# EAGLE board 8bitbig-bacon_home-back_pcb (EAGLE 9.2.2)
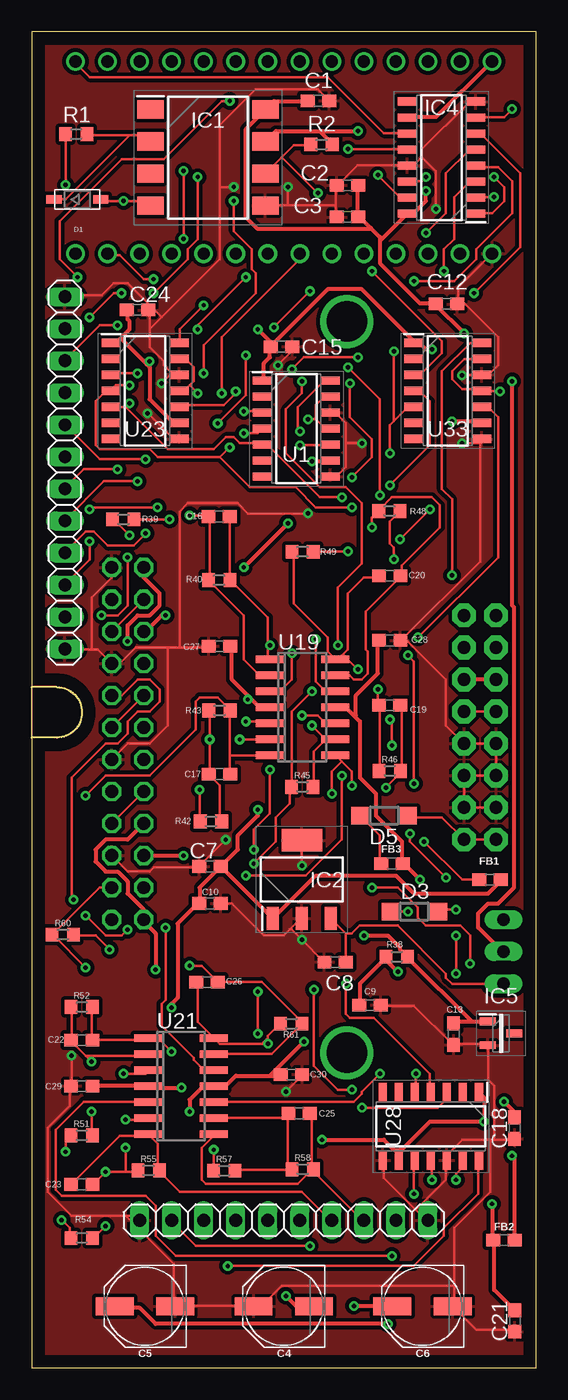
[diagram p0: board, top side]
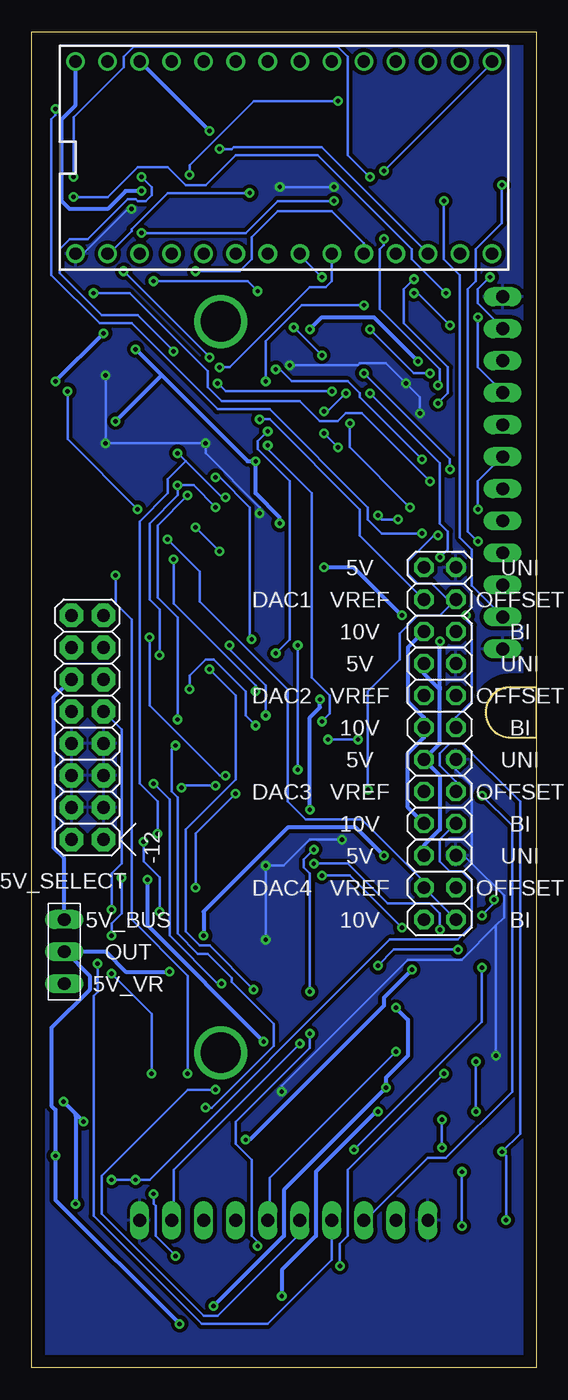
[diagram p1: board, bottom side, seen from below]

Size 40 x 106 mm. Coordinates in mm from the lower left corner, seen from the top.
Outline: 0,0 40,0 40,106 0,106 0,0
Copper layers (1*16): Top 0.035mm / dielectric 1.5mm / Bottom 0.035mm
Design rules "default *": minimum track width 6mil, minimum drill 0.35mm, track to track 0.3mm, track to pad 0.3mm, pad to pad 0.3mm, via to via 0.3mm, smd to smd 0.3mm, copper to edge 40mil, drill to drill 0.3mm, minimum pad ring 10mil, minimum via ring 8mil, stop-mask expansion 4mil, vias tented up to drill 0mil, thermal gap 10mil
Net classes: 0 default: width 0.203 mm, clearance 0.203 mm; 1 powerlines: width 0.305 mm, clearance 0.305 mm

## Footprints (pad centres in the part's own frame; a part is rotated, then mirrored left to right if it is on the bottom)
C0603 = smd 1.1 x 1: 1 -0.85,0; 2 0.85,0
PANASONIC_D = smd 3 x 1.4: + 2.4,0; - -2.4,0
SOD-123 = smd 1.2 x 0.7: A 1.85,0; C -1.85,0
DIODE_SOD123 = smd 1.4 x 1.4: A 1.9,0; C -1.9,0
NEW_SELECTOR = drill 1.016 octagon: 1 0,5.08; 2 2.54,5.08; 3 0,2.54; 4 2.54,2.54; 5 0,0; 6 2.54,0
0603 = smd 1.1 x 1: 1 -0.85,0; 2 0.85,0
SOP254P1016X460-8N = smd 2.1 x 1.45: 1 -4.55,3.81; 2 -4.55,1.27; 3 -4.55,-1.27; 4 -4.55,-3.81; 5 4.55,-3.81; 6 4.55,-1.27; 7 4.55,1.27; 8 4.55,3.81
SOT230P700X180-4N = smd 1.8 x 0.95: 1 -3.1,2.3; 2 -3.1,0; 3 -3.1,-2.3 | smd 1.8 x 3.2: 4 3.1,0
SOIC127P600X175-16N = smd 1.525 x 0.65: 1 -2.712,4.445; 2 -2.712,3.175; 3 -2.712,1.905; 4 -2.712,0.635; 5 -2.712,-0.635; 6 -2.712,-1.905; 7 -2.712,-3.175; 8 -2.712,-4.445; 9 2.712,-4.445; 10 2.712,-3.175; 11 2.712,-1.905; 12 2.712,-0.635; 13 2.712,0.635; 14 2.712,1.905; 15 2.712,3.175; 16 2.712,4.445
SOT95P237X112-3N = smd 1.25 x 0.6: 1 -1.05,0.95; 2 -1.05,-0.95; 3 1.05,0
SELECTOR_POWER = drill 1.016 long: 1-BUS 0,5.08; 2-OUT 0,2.54; 3-5V_VR 0,0
1X12 = drill 1.016 long: 1 -13.97,0; 2 -11.43,0; 3 -8.89,0; 4 -6.35,0; 5 -3.81,0; 6 -1.27,0; 7 1.27,0; 8 3.81,0; 9 6.35,0; 10 8.89,0; 11 11.43,0; 12 13.97,0
1X10 = drill 1.016 long: 1 -11.43,0; 2 -8.89,0; 3 -6.35,0; 4 -3.81,0; 5 -1.27,0; 6 1.27,0; 7 3.81,0; 8 6.35,0; 9 8.89,0; 10 11.43,0
R0603 = smd 1 x 1.1: 1 -0.85,0; 2 0.85,0
TEENSY_3.0-3.2&LC_DIL = drill 0.965: 0 -7.62,13.97; 1 -7.62,11.43; 2 -7.62,8.89; 3 -7.62,6.35; 3.3V 7.62,11.43; 4 -7.62,3.81; 5 -7.62,1.27; 6 -7.62,-1.27; 7 -7.62,-3.81; 8 -7.62,-6.35; 9 -7.62,-8.89; 10 -7.62,-11.43; 11 -7.62,-13.97; 12 -7.62,-16.51; 13 7.62,-16.51; 14/A0 7.62,-13.97; 15/A1 7.62,-11.43; 16/A2 7.62,-8.89; 17/A3 7.62,-6.35; 18/A4 7.62,-3.81; 19/A5 7.62,-1.27; 20/A6 7.62,1.27; 21/A7 7.62,3.81; 22/A8 7.62,6.35; 23/A9 7.62,8.89; AGND 7.62,13.97; GND -7.62,16.51; VIN 7.62,16.51
SOIC127P600X175-14N = smd 1.5 x 0.65: 1 -2.7,3.81; 2 -2.7,2.54; 3 -2.7,1.27; 4 -2.7,0; 5 -2.7,-1.27; 6 -2.7,-2.54; 7 -2.7,-3.81; 8 2.7,-3.81; 9 2.7,-2.54; 10 2.7,-1.27; 11 2.7,0; 12 2.7,1.27; 13 2.7,2.54; 14 2.7,3.81
SO14 = smd 0.6 x 2.2: 1 -3.81,-2.6; 2 -2.54,-2.6; 3 -1.27,-2.6; 4 0,-2.6; 5 1.27,-2.6; 6 2.54,-2.6; 7 3.81,-2.6; 8 3.81,2.6; 9 2.54,2.6; 10 1.27,2.6; 11 0,2.6; 12 -1.27,2.6; 13 -2.54,2.6; 14 -3.81,2.6
POWER_16 = drill 1.016 pad 1.88 octagon: 1 -6.35,-1.27; 2 -6.35,1.27; 3 -3.81,-1.27; 4 -3.81,1.27; 5 -1.27,-1.27; 6 -1.27,1.27; 7 1.27,-1.27; 8 1.27,1.27; 9 3.81,-1.27; 10 3.81,1.27; 11 6.35,-1.27; 12 6.35,1.27; 13 8.89,-1.27; 14 8.89,1.27; 15 11.43,-1.27; 16 11.43,1.27

## Placement (x,y rotation side)
C1  100n  [C0603]  22.75,100.5 0 top
C2  1u  [C0603]  25.06,93.8 180 top
C3  100n  [C0603]  25.04,91.29 180 top
C4  47uF  [PANASONIC_D]  20,4.89 180 top
C5  47uF  [PANASONIC_D]  9,4.89 180 top
C6  47uF  [PANASONIC_D]  31,4.89 180 top
C7  330n  [C0603]  14.16,39.78 180 top
C8  100n  [C0603]  24.08,32.2 180 top
C9  100n  [C0603]  26.83,28.78 0 top
C10  100n  [C0603]  14.14,36.84 0 top
C12  100n  [C0603]  32.91,84.39 0 top
C13  100n  [C0603]  33.46,26.48 270 top
C15  100n  [C0603]  19.81,81 0 top
C16  47p  [C0603]  14.88,67.53 0 top
C17  47p  [C0603]  14.9,47.1 0 top
C18  100n  [C0603]  38.3,19.02 270 top
C19  47p  [C0603]  28.4,52.56 0 top
C20  47p  [C0603]  28.4,62.83 180 top
C21  100n  [C0603]  38.32,3.74 270 top
C22  47p  [C0603]  3.98,26 0 top
C23  47p  [C0603]  3.98,14.57 180 top
C24  100n  [C0603]  8.4,83.91 0 top
C25  47p  [C0603]  21.22,20.2 0 top
C26  47p  [C0603]  13.92,30.61 180 top
C27  100n  [C0603]  14.9,57.25 180 top
C28  100n  [C0603]  28.4,57.71 180 top
C29  100n  [C0603]  3.98,22.36 180 top
C30  100n  [C0603]  20.6,23.28 180 top
D1  4148 SOD 123  [SOD-123]  3.63,92.68 0 top
D3  1N5819HW  [DIODE_SOD123]  30.35,36.2 0 top
D5  1N5819HW  [DIODE_SOD123]  27.96,43.81 180 top
DAC1  [NEW_SELECTOR]  6.35,63.5 180 bottom
DAC2  [NEW_SELECTOR]  6.35,55.88 180 bottom
DAC3  [NEW_SELECTOR]  6.35,48.26 180 bottom
DAC4  [NEW_SELECTOR]  6.35,40.64 180 bottom
FB1  30Ω/1.8A  [0603]  36.34,38.73 0 top
FB2  30Ω/1.8A  [0603]  37.47,10.14 0 top
FB3  30Ω/1.8A  [0603]  28.57,40.01 0 top
IC1  6N137S  [SOP254P1016X460-8N]  14,96 0 top
IC2  UA78M05CDCYR  [SOT230P700X180-4N]  21.43,38.75 90 top
IC4  SN74HC595DR  [SOIC127P600X175-16N]  32.5,96 180 top
IC5  LM4040CIM3-2.5_NOPB  [SOT95P237X112-3N]  37.23,26.54 0 top
JP1  [SELECTOR_POWER]  37.41,30.48 0 bottom
JP2  [1X12]  2.65,71 270 top
JP3  [1X10]  20,11.71 0 top
R1  220R  [R0603]  3.55,97.86 0 top
R2  470R  [R0603]  22.99,97.04 0 top
R38  470R  [R0603]  28.96,32.62 0 top
R39  100k  [R0603]  7.28,67.31 0 top
R40  100k  [R0603]  14.88,62.49 0 top
R42  100k  [R0603]  14.23,43.35 0 top
R43  100k  [R0603]  14.9,52.16 0 top
R45  100k  [R0603]  21.47,46.1 0 top
R46  100k  [R0603]  28.4,47.36 0 top
R48  100k  [R0603]  28.38,67.97 180 top
R49  100k  [R0603]  21.49,64.74 180 top
R51  100k  [R0603]  3.98,18.45 0 top
R52  100k  [R0603]  3.98,28.63 0 top
R54  100k  [R0603]  3.98,10.31 0 top
R55  100k  [R0603]  9.29,15.67 0 top
R57  100k  [R0603]  15.28,15.65 0 top
R58  100k  [R0603]  21.5,15.77 0 top
R60  100k  [R0603]  2.49,34.37 0 top
R61  100k  [R0603]  20.6,27.31 180 top
TEENSY_3.2  TEENSY_3.1-3.2_DIL  [TEENSY_3.0-3.2&LC_DIL]  20,96 90 bottom
U1  MCP4922T-E_SL  [SOIC127P600X175-14N]  21,74.5 0 top
U19  TL074_SMD  [SO14]  21.47,52.4 270 top
U21  TL074_SMD  [SO14]  11.85,22.35 270 top
U23  MCP4922T-E_SL  [SOIC127P600X175-14N]  9,77.5 0 top
U28  MCP4922T-E_SL  [SOIC127P600X175-14N]  31.66,19.16 270 top
U33  MCP4922T-E_SL  [SOIC127P600X175-14N]  33,77.5 0 top
U$1  [PANEL_CABLE_CUTOUT]  0,52 0 top
U$4  POWER  [POWER_16]  35.56,48.26 90 bottom

## Library data of the parts
C1-C3 C7-C10 C12 C13 C15-C30 R1 R2 R38-R40 R42 R43 R45 R46 R48 R49 R51 R52 R54 R55 R57 R58 R60 R61 = resistor
C4-C6 = SparkFun-Capacitors; PROD_ID: CAP-08478
D1 = adafruit
D3 D5 = grids_v02
DAC1-DAC4 JP1 U$1 = SchnitzelsComponents
FB1-FB3 = SparkFun-Coils; PROD_ID: NDUC-07859
IC1 = SamacSys_Parts; DESCRIPTION: High Speed Optocouplers High Speed 10MBd LogicGate Output; HEIGHT: 4.6mm; MANUFACTURER_NAME: Lite-On; MANUFACTURER_PART_NUMBER: 6N137S; MOUSER_PART_NUMBER: 859-6N137S; MOUSER_PRICE-STOCK: https://www.mouser.com/Search/Refine.aspx?Keyword=859-6N137S
IC2 = SamacSys_Parts; DESCRIPTION: 500-mA, 25-V, Linear Voltage Regulators; HEIGHT: 1.8mm; MANUFACTURER_NAME: Texas Instruments; MANUFACTURER_PART_NUMBER: UA78M05CDCYR; MOUSER_PART_NUMBER: 595-UA78M05CDCYR; MOUSER_PRICE-STOCK: https://www.mouser.com/Search/Refine.aspx?Keyword=595-UA78M05CDCYR
IC4 = SamacSys_Parts; DESCRIPTION: 8-Bit Shift Register 3-ST SN74HC595DRG4 SN74HC595DR, 8-stage Shift Register, Serial to Serial/Parallel, 2 ???????? 6 V, 16-Pin SOIC%0; HEIGHT: 1.75mm; MANUFACTURER_NAME: Texas Instruments; MANUFACTURER_PART_NUMBER: SN74HC595DR; MOUSER_PART_NUMBER: 595-SN74HC595DR; MOUSER_PRICE-STOCK: https://www.mouser.com/Search/Refine.aspx?Keyword=595-SN74HC595DR
IC5 = SamacSys_Parts; DESCRIPTION: 100-ppm/C precision micropower shunt voltage reference; HEIGHT: 1.12mm; MANUFACTURER_NAME: Texas Instruments; MANUFACTURER_PART_NUMBER: LM4040CIM3-2.5/NOPB; MOUSER_PART_NUMBER: 926-LM4040CIM325NOPB; MOUSER_PRICE-STOCK: https://www.mouser.com/Search/Refine.aspx?Keyword=926-LM4040CIM325NOPB; RS_PART_NUMBER: 5359600P; RS_PRICE-STOCK: http://uk.rs-online.com/web/p/products/5359600P
JP2 JP3 = pinhead
TEENSY_3.2 = Teensy_3_and_LC_Series_Boards_v1.4
U1 U23 U28 U33 = SamacSys_Parts; ALLIED_NUMBER: 70451434; ALLIED_PRICE-STOCK: https://www.alliedelec.com/microchip-technology-inc-mcp4922t-e-sl/70451434/; DESCRIPTION: Digital to Analog Converters - DAC Dual 12-bit SPI int; HEIGHT: 1.75mm; MANUFACTURER_NAME: Microchip; MANUFACTURER_PART_NUMBER: MCP4922T-E/SL; MOUSER_PART_NUMBER: 579-MCP4922T-E/SL; MOUSER_PRICE-STOCK: https://www.mouser.com/Search/Refine.aspx?Keyword=579-MCP4922T-E%2FSL; RS_PART_NUMBER: 1773106P; RS_PRICE-STOCK: http://uk.rs-online.com/web/p/products/1773106P
U19 = MusicThingModular; SPICEPREFIX: U
U21 = MusicThingModular
U$4 = eurorack

## Nets
5V_BUS [powerlines]: JP1.1-BUS U$4.11 U$4.12
+2V5 [powerlines]: C13.1 DAC1.6 DAC2.6 DAC3.6 DAC4.6 IC5.1 R38.2
+3V3 [powerlines]: IC1.7 R2.2 TEENSY_3.2.3.3V
+5V [powerlines]: C1.1 C2.1 C3.1 C5.+ C9.1 C12.1 FB2.2 IC1.8 IC4.10 IC4.16 JP1.2-OUT R38.1 TEENSY_3.2.VIN
+5V_A [powerlines]: C15.1 C18.1 C21.1 C24.1 DAC1.2 DAC2.2 DAC3.2 DAC4.2 FB2.1 U1.1 U1.9 U23.1 U23.9 U28.1 U28.9 U33.1 U33.9
+12V [powerlines]: C6.+ C7.1 C10.1 C27.1 C29.1 FB1.2 IC2.1 U19.4 U21.4
-12V [powerlines]: C4.- C28.2 C30.2 FB3.2 U19.11 U21.11
AGND [powerlines]: TEENSY_3.2.AGND
CS1: TEENSY_3.2.5 U1.3
CS2: TEENSY_3.2.6 U23.3
CS3: TEENSY_3.2.7 U28.3
CS4: TEENSY_3.2.8 U33.3
CS5: TEENSY_3.2.9
CS6: IC4.12 TEENSY_3.2.10
CV1: C16.2 JP3.2 R40.2 U19.1
CV2: C17.2 JP3.3 R43.2 U19.7
CV3: C19.2 JP3.4 R46.2 U19.8
CV4: C20.2 JP3.5 R49.2 U19.14
CV5: C22.2 JP3.6 R52.2 U21.1
CV6: C23.2 JP3.7 R55.2 U21.7
CV7: C25.2 JP3.8 R58.2 U21.8
CV8: C26.2 JP3.9 R61.2 U21.14
DAC1: U1.14 U19.3
DAC2: U1.10 U19.5
DAC3: U19.10 U23.14
DAC4: U19.12 U23.10
DAC5: U21.3 U28.14
DAC6: U21.5 U28.10
DAC7: U21.10 U33.14
DAC8: U21.12 U33.10
GATE9: IC4.15 JP2.2
GATE10: IC4.1 JP2.3
GATE11: IC4.2 JP2.4
GATE12: IC4.3 JP2.5
GATE13: IC4.4 JP2.6
GATE14: IC4.5 JP2.7
GATE15: IC4.6 JP2.8
GATE16: IC4.7 JP2.9
GND: C1.2 C2.2 C3.2 C4.+ C5.- C6.- C7.2 C8.2 C9.2 C10.2 C12.2 C13.2 C15.2 C18.2 C21.2 C24.2 C27.2 C28.1 C29.2 C30.1 DAC1.5 DAC2.5 DAC3.5 DAC4.5 IC1.5 IC2.2 IC2.4 IC4.8 IC4.13 IC5.2 JP2.1 JP2.12 JP3.1 JP3.10 TEENSY_3.2.GND U1.8 U1.12 U23.8 U23.12 U28.8 U28.12 U33.8 U33.12 U$4.3 U$4.4 U$4.5 U$4.6 U$4.7 U$4.8
MIDI_IN_L: D1.A IC1.4 JP2.11
MIDI_IN_R: JP2.10 R1.1
N$2: D1.C IC1.2 R1.2
N$4: IC1.6 R2.1 TEENSY_3.2.0
N$6: D3.A U$4.9 U$4.10
N$8: D5.C U$4.1 U$4.2
N$10: D3.C FB1.1
N$11: C16.1 R39.2 R40.1 U19.2
N$13: D5.A FB3.1
N$14: C8.1 IC2.3 JP1.3-5V_VR
N$52: C17.1 R42.2 R43.1 U19.6
N$55: C19.1 R45.2 R46.1 U19.9
N$58: C20.1 R48.2 R49.1 U19.13
N$61: C22.1 R51.2 R52.1 U21.2
N$64: C23.1 R54.2 R55.1 U21.6
N$67: C25.1 R57.2 R58.1 U21.9
N$70: C26.1 R60.2 R61.1 U21.13
OFFSET1: DAC1.3 R39.1 R42.1
OFFSET2: DAC2.3 R45.1 R48.1
OFFSET3: DAC3.3 R51.1 R54.1
OFFSET4: DAC4.3 R57.1 R60.1
SCK: IC4.11 TEENSY_3.2.13 U1.4 U23.4 U28.4 U33.4
SDI: IC4.14 TEENSY_3.2.11 U1.5 U23.5 U28.5 U33.5
VREF1: DAC1.1 DAC1.4 U1.11 U1.13
VREF2: DAC2.1 DAC2.4 U23.11 U23.13
VREF3: DAC3.1 DAC3.4 U28.11 U28.13
VREF4: DAC4.1 DAC4.4 U33.11 U33.13

## Tracks (layer width: path | path; a pad name or v marks a point on that pad's centre or on a via)
5V_BUS
  Top 0.305: U$4.12 U$4.11
  Bottom 0.305: U$4.12 38.26,53.18 38.26,41.27 37.47,40.48 37.47,35.56 JP1.1-BUS
+2V5  (via drill 0.35)
  Top 0.305: 34.92,27.46 36.04,27.46 IC5.1 | 34.92,27.46 33.5,27.46 C13.1 | 34.92,27.46 29.84,32.54 R38.2 29.69,32.7 29.21,33.18 29.21,33.34 28.26,34.29 v26.35,34.29 | DAC1.6 8.89,62.71 10.16,61.44 10.16,60.48 9.37,59.69 8.41,59.69 7.62,58.9 v7.62,57.63 | DAC4.6 v12.06,40.64
  Bottom 0.305: DAC4.6 8.89,41.43 7.62,42.7 7.62,46.99 DAC3.6 7.62,49.53 7.62,53.82 7.7,53.9 | DAC2.6 8.89,55.09 7.7,53.9 | v7.62,57.63 7.62,53.98 7.7,53.9 | v26.35,34.29 26.35,36.2 19.68,42.86 14.29,42.86 v12.06,40.64
+3V3  (via drill 0.35)
  Top 0.305: 22.94,98.03 22.86,98.11 19.37,98.11 18.57,97.31 IC1.7 | 22.94,98.03 23.81,97.16 R2.2 | v25.88,98.11 23.02,98.11 22.94,98.03
  Bottom 0.305: v25.88,98.11 31.27,103.5 TEENSY_3.2.3.3V
+5V  (via drill 0.35)
  Top 0.305: IC4.10 29.84,99.22 32.07,99.22 36.35,103.5 TEENSY_3.2.VIN | C1.1 21.75,100.49 19.21,100.49 18.57,99.85 IC1.8 18.41,99.69 16.99,98.27 16.99,91.28 17.94,90.33 26.83,90.33 26.91,90.41 | 27.62,89.38 27.62,89.69 26.91,90.41 | 27.62,89.38 27.62,87.63 30.8,84.45 31.91,84.45 C12.1 32.07,84.3 v34.29,82.07 | 26.91,90.41 26.04,91.28 C3.1 25.88,91.44 25.88,93.66 C2.1 | 27.62,89.38 29.69,91.44 IC4.16 29.84,91.6 30.32,91.6 31.27,92.55 v31.27,93.34 | C9.1 26.04,28.89 26.04,30.48 28.1,32.54 R38.1 28.1,32.38 v29.05,31.43 | v38.1,16.83 38.26,16.67 38.26,10.16 FB2.2 | v28.26,3.49 9.84,3.49 8.57,4.76 6.67,4.76 C5.+ | v38.1,78.26 38.1,60.48 38.26,60.33 38.26,38.1 36.99,36.83 36.2,36.83 35.4,36.04 35.4,34.92 37.31,33.02 JP1.2-OUT
  Bottom 0.305: v31.27,93.34 32.54,93.34 33.97,91.92 36.99,91.92 37.62,92.55 37.62,99.06 36.51,100.17 36.51,103.5 TEENSY_3.2.VIN | v28.26,3.49 38.1,13.34 v38.1,16.83 38.1,20.48 38.42,20.8 38.42,26.99 35.4,30 35.4,31.11 37.31,33.02 JP1.2-OUT 34.13,33.02 32.54,31.43 v29.05,31.43 | v38.1,78.26 v34.29,82.07
+5V_A  (via drill 0.35)
  Top 0.305: 7.06,81.68 6.83,81.44 6.35,81.44 U23.1 | 7.06,81.68 7.78,82.39 7.78,83.03 7.62,83.19 7.62,83.82 C24.1 | 7.06,81.68 9.13,79.61 | 9.13,79.61 9.37,79.38 9.37,76.83 11.11,75.09 11.59,75.09 U23.9 | C15.1 18.89,80.96 18.89,80.17 18.41,79.69 18.41,78.42 U1.1 | v22.23,71.91 23.65,71.91 U1.9 | v31.75,80.8 31.27,80.8 30.8,81.28 30.32,81.28 U33.1 30.32,81.44 26.19,85.57 23.5,85.57 19.05,81.12 C15.1 | v33.34,75.09 35.56,75.09 U33.9 | v9.37,79.85 9.13,79.61 | v17.94,82.39 19.05,81.28 C15.1 | C21.1 38.26,4.6 36.67,6.19 36.67,10 FB2.1 36.51,10.16 v36.51,13.02 | v37.47,21.11 38.26,20.32 38.26,20 C18.1 | U28.1 35.56,21.75 35.88,21.43 v35.88,19.53 31.59,19.53 29.29,17.22 | 29.29,17.22 29.21,17.14 29.21,16.51 U28.9 | DAC3.2 7.62,41.91 5.87,41.91 5.08,41.12 5.08,40.16 5.87,39.37 6.83,39.37 7.62,38.58 7.62,37.62 8.89,36.35 DAC4.2 8.89,35.4 9.84,34.45 v9.84,31.59 | v23.02,18.1 27.94,18.1 28.73,17.3 29.21,17.3 29.29,17.22 | v16.83,63.5 v20.32,66.99 | v10.64,59.69 10.32,59.69 9.05,58.42 DAC1.2
  Bottom 0.305: v31.75,80.8 29.69,78.74 | 29.69,78.74 22.86,71.91 v22.23,71.91 22.23,69.37 20.32,67.47 v20.32,66.99 | 29.69,78.74 v33.34,75.09 | v9.37,79.85 12.86,83.34 16.99,83.34 v17.94,82.39 | v35.88,19.53 36.43,20.08 | 36.43,20.08 v37.47,21.11 | v36.51,13.02 36.51,20 36.43,20.08 | DAC1.2 10.16,57.15 10.16,52.86 8.89,51.59 DAC2.2 8.89,50.01 10.16,48.74 10.16,44.45 DAC3.2 | v23.02,18.1 22.7,18.1 12.06,28.73 12.06,29.37 v9.84,31.59 | v16.83,63.5 14.45,63.5 v10.64,59.69
+12V  (via drill 0.35)
  Top 0.305: C29.1 4.92,22.38 9.21,22.38 U21.4 9.37,22.23 v11.91,22.23 | v25.56,4.92 28.57,4.92 C6.+ | 17.22,53.26 17.94,52.55 18.73,52.55 U19.4 | 17.22,53.26 15.88,54.61 15.88,57.15 C27.1 | C7.1 14.92,39.69 13.34,38.1 13.34,36.99 C10.1 13.18,36.83 11.59,35.24 11.59,29.37 11.11,28.89 v11.11,28.57 | FB1.2 37.15,38.58 36.2,37.62 30.32,37.62 28.89,39.05 22.54,39.05 19.21,35.72 IC2.1 19.05,35.72 15.08,39.69 C7.1 | v17.14,53.02 17.14,53.18 17.22,53.26 | v17.94,44.29 17.94,43.81 16.35,42.23 16.35,41.12 15.08,39.85 C7.1
  Bottom 0.305: v25.56,4.92 20,10.48 20,14.13 v11.91,22.23 11.91,23.02 10.16,24.77 10.16,27.62 v11.11,28.57 | v17.14,53.02 17.14,52.39 17.94,51.59 v17.94,44.29
-12V  (via drill 0.35)
  Top 0.305: 25.64,51.67 24.92,52.39 24.13,52.39 U19.11 | 25.64,51.67 26.04,51.28 26.04,46.83 27.3,45.56 27.3,43.81 29.37,41.75 29.37,40.16 FB3.2 29.53,40.01 v30.8,38.73 | C28.2 27.46,57.63 27.46,55.09 25.72,53.34 25.72,51.75 25.64,51.67 | 18.89,23.18 16.19,23.18 15.4,22.38 14.61,22.38 U21.11 14.45,22.23 13.49,22.23 12.54,21.27 v12.54,20.32 | 18.89,23.18 19.68,23.18 C30.2 | v20.16,5.71 20.95,4.92 22.38,4.92 C4.- | 18.89,23.18 v21.59,25.88
  Bottom 0.305: v20.16,5.71 20.16,7.78 17.46,10.48 17.46,15.56 12.7,20.32 v12.54,20.32 | v30.8,38.73 30.8,35.08 v21.59,25.88
CS1  (via drill 0.35)
  Top 0.203: v16.83,75.88 18.26,75.88 U1.3 | v15.08,77.31 15.08,81.76 21.11,87.79 21.11,88.27 TEENSY_3.2.5
  Bottom 0.203: v16.83,75.88 16.51,75.88 v15.08,77.31
CS2  (via drill 0.35)
  Top 0.203: v8.41,78.9 6.35,78.9 U23.3 | v13.18,82.39 13.18,82.71 v16.99,86.52
  Bottom 0.203: v8.41,78.9 9.68,78.9 v13.18,82.39 | v16.99,86.52 18.73,88.27 TEENSY_3.2.6
CS3  (via drill 0.35)
  Top 0.203: v26.19,20.64 32.23,20.64 32.86,21.27 32.86,21.75 U28.3 | v28.57,49.37 28.57,51.28 v28.42,51.44 | v27.62,69.22 27.62,76.83 v25.08,79.38
  Bottom 0.203: v26.19,20.64 25.72,20.64 20.8,25.56 20.8,27.3 24.13,30.64 24.13,30.96 26.04,32.86 26.83,32.86 28.42,34.45 28.42,45.24 28.89,45.72 28.89,49.05 v28.57,49.37 | v28.42,51.44 28.42,59.53 30,61.12 30,66.83 v27.62,69.22 | v25.08,79.38 24.29,79.38 17.94,85.72 16.67,85.72 16.19,86.2 16.19,88.27 TEENSY_3.2.7
CS4  (via drill 0.35)
  Top 0.203: v26.99,87 32.54,81.44 32.54,80.49 30.96,78.9 30.32,78.9 U33.3
  Bottom 0.203: v26.99,87 23.5,87 22.54,87.95 22.54,89.69 20.48,91.76 16.19,91.76 13.65,89.22 13.65,88.42 TEENSY_3.2.8
CS6  (via drill 0.35)
  Top 0.203: v25.08,96.68 29.69,96.68 IC4.12
  Bottom 0.203: v25.08,96.68 24.13,96.68 23.97,96.84 16.99,96.84 8.57,88.42 TEENSY_3.2.10
CV1  (via drill 0.35)
  Top 0.203: C16.2 15.72,67.47 15.72,62.55 R40.2 15.88,62.39 18.73,59.53 18.73,57.31 | 18.73,57.31 18.73,56.36 U19.1 | v22.07,9.68 13.02,9.68 11.11,11.59 JP3.2 | v17.94,29.84 v17.94,26.51 | v17.62,41.12 17.62,42.7 18.89,43.97 v18.89,47.47 | 18.73,57.31 v18.89,57.31
  Bottom 0.203: v22.07,9.68 22.07,10 22.54,10.48 22.54,16.51 23.81,17.78 23.81,19.53 17.94,25.4 v17.94,26.51 | v17.94,29.84 17.94,39.21 18.41,39.69 18.41,40.32 v17.62,41.12 | v18.89,57.31 v18.89,47.47
CV2  (via drill 0.35)
  Top 0.203: 15.72,48.58 15.72,52.07 R43.2 15.72,52.23 14.76,53.18 13.34,53.18 13.02,52.86 13.02,50.64 9.37,46.99 5.87,46.99 v4.29,45.4 | 15.72,48.58 15.72,47.15 C17.2 | 15.72,48.58 18.73,48.58 U19.7
  Bottom 0.203: v4.29,45.4 1.91,43.02 1.91,21.91 7.14,16.67 8.57,16.67 13.49,11.75 JP3.3
CV3  (via drill 0.35)
  Top 0.203: C19.2 29.37,52.55 29.37,47.47 R46.2 29.37,47.31 v28.1,46.04 | 24.61,48.1 25.4,47.31 v25.4,46.2 | 24.61,48.1 24.13,48.58 U19.8 | v34.77,32.07 34.77,34.29 33.97,35.08 31.27,35.08 30.64,35.72 30.64,36.51 29.05,38.1 v26.99,38.1 | v23.81,45.56 23.81,47.31 24.61,48.1
  Bottom 0.203: v25.4,46.2 27.94,46.2 v28.1,46.04 | v34.77,32.07 34.77,29.84 35.08,29.53 35.08,12.06 26.51,3.49 21.27,3.49 16.19,8.57 16.19,11.59 JP3.4 | v26.99,38.1 26.99,42.39 v23.81,45.56
CV4  (via drill 0.35)
  Top 0.203: 24.61,56.52 24.45,56.36 24.13,56.36 U19.14 23.97,56.36 23.5,56.83 23.5,57.94 20.8,60.64 20.8,64.61 R49.2 | 24.61,56.52 25.08,56.99 25.08,61.44 26.35,62.71 27.46,62.71 C20.2 | v25.4,22.07 24.29,22.07 22.38,23.97 v22.38,30 | v25.88,55.4 24.77,56.52 24.61,56.52
  Bottom 0.203: v25.4,22.07 27.62,22.07 34.45,15.24 34.45,12.22 26.35,4.13 25.24,4.13 18.73,10.64 18.73,11.59 JP3.5 | v22.38,30 25.88,33.5 26.67,33.5 27.78,34.61 27.78,42.7 23.81,46.67 23.81,53.34 v25.88,55.4
CV5  (via drill 0.35)
  Top 0.203: R52.2 4.76,28.57 4.76,26.04 C22.2 4.92,26.04 9.21,26.04 U21.1 9.37,26.04 10.16,26.04 v11.11,25.08
  Bottom 0.203: v11.11,25.08 21.11,15.08 21.11,11.75 JP3.6
CV6
  Top 0.203: C23.2 3.17,14.61 6.99,18.41 9.21,18.41 U21.7 9.37,18.41 10,17.78 10,15.72 R55.2 10.16,15.56 11.75,13.97 21.43,13.97 23.65,11.75 JP3.7
CV7
  Top 0.203: C25.2 22.23,20.16 22.23,15.88 R58.2 22.23,15.72 | 22.23,15.72 21.11,14.61 13.81,14.61 13.49,14.92 13.49,17.46 14.45,18.41 U21.8 | 22.23,15.72 26.19,11.75 JP3.8
CV8  (via drill 0.35)
  Top 0.203: 18.26,25.72 18.73,26.19 18.73,26.35 19.68,27.3 R61.2 | 18.26,25.72 14.92,25.72 14.61,26.04 U21.14 14.45,26.19 13.18,27.46 13.18,30.48 C26.2 | 18.26,25.72 v18.73,25.72
  Bottom 0.203: v18.73,25.72 28.73,15.72 28.73,11.75 JP3.9
DAC1  (via drill 0.35)
  Top 0.203: v21.27,74.3 21.11,74.45 21.11,76.2 23.18,78.26 23.65,78.26 U1.14 | v20.64,56.67 20.64,54.61 19.84,53.82 18.89,53.82 U19.3
  Bottom 0.203: v21.27,74.3 22.07,73.5 22.07,72.87 19.53,70.33 19.53,57.78 v20.64,56.67
DAC2  (via drill 0.35)
  Top 0.203: v21.27,73.18 23.65,73.18 U1.10 | v16.99,51.28 18.73,51.28 U19.5
  Bottom 0.203: v21.27,73.18 21.27,72.87 17.78,69.37 17.78,54.77 16.35,53.34 16.35,51.91 v16.99,51.28
DAC3  (via drill 0.35)
  Top 0.203: v13.65,84.3 11.75,82.39 11.75,81.44 U23.14 | v21.43,78.26 21.43,77.31 20.16,76.04 20.16,72.55 22.86,69.85 24.92,69.85 26.19,68.58 26.19,63.82 24.29,61.91 v24.29,57.31 | v21.43,51.75 22.7,51.75 23.18,51.28 23.97,51.28 U19.10
  Bottom 0.203: v13.65,84.3 18.57,84.3 21.43,81.44 v21.43,78.26 | v24.29,57.31 24.29,56.99 21.43,54.13 v21.43,51.75
DAC4  (via drill 0.35)
  Top 0.203: v16.19,77.47 16.19,77.31 15.24,76.36 11.75,76.36 U23.10 | v25.24,78.11 25.24,75.41 26.99,73.66 26.99,72.23 v25.4,70.64 | v22.54,57.78 22.54,54.45 23.18,53.82 23.97,53.82 U19.12
  Bottom 0.203: v16.19,77.47 24.61,77.47 v25.24,78.11 | v25.4,70.64 25.08,70.64 22.7,68.26 22.7,57.94 v22.54,57.78
DAC5  (via drill 0.35)
  Top 0.203: v15.56,8.1 30.32,8.1 32.7,10.48 32.7,11.11 35.4,13.81 35.4,16.35 U28.14 | v7.3,23.34 9.05,23.34 9.21,23.5 U21.3
  Bottom 0.203: v15.56,8.1 15.56,9.84 14.92,10.48 14.92,15.72 v7.3,23.34
DAC6  (via drill 0.35)
  Top 0.203: v30.32,13.81 30.32,16.35 U28.10 | v28.57,8.89 11.43,8.89 9.84,10.48 9.84,12.86 9.05,13.65 2.38,13.65 1.91,14.13 1.91,18.89 4.13,21.11 9.21,21.11 U21.5
  Bottom 0.203: v30.32,13.81 30.32,13.02 30.16,12.86 30.16,10.48 v28.57,8.89
DAC7  (via drill 0.35)
  Top 0.203: v33.34,62.87 33.34,68.9 32.54,69.69 32.54,79.06 34.77,81.28 35.56,81.28 U33.14 | v27.62,23.34 26.19,21.91 26.19,21.75 25.56,21.11 14.61,21.11 U21.10
  Bottom 0.203: v33.34,62.87 33.34,60.64 32.07,59.37 32.07,35.56 27.62,31.11 v27.62,23.34
DAC8  (via drill 0.35)
  Top 0.203: v30.64,57.94 36.99,64.29 36.99,75.41 36.2,76.2 35.72,76.2 U33.10 | v24.61,46.99 24.61,41.91 21.75,39.05 v16.99,39.05 | v10.64,34.92 10.64,29.21 10.32,28.89 10.32,27.15 12.86,24.61 12.86,24.45 13.65,23.65 14.45,23.65 U21.12
  Bottom 0.203: v30.64,57.94 30.64,52.55 25.08,46.99 v24.61,46.99 | v16.99,39.05 14.76,39.05 v10.64,34.92
GATE9  (via drill 0.35)
  Top 0.203: v27.46,94.61 29.21,92.87 29.69,92.87 IC4.15 | v15.72,100.49 15.08,100.49 10.48,95.89 7.14,95.89 2.22,90.96 2.22,87.95 v3.65,86.52
  Bottom 0.203: v27.46,94.61 27.46,95.41 22.38,100.49 v15.72,100.49 | v3.65,86.52 4.6,85.57 4.6,84.45 2.7,82.55 JP2.2
GATE10  (via drill 0.35)
  Top 0.203: v36.67,94.46 37.47,93.66 37.47,92.55 36.51,91.6 35.24,91.6 IC4.1 | v13.18,94.46 13.18,89.53 12.38,88.74 12.38,87.95 v9.68,85.25 | v6.83,82.71 5.4,82.71 2.7,80.01 JP2.3
  Bottom 0.203: v36.67,94.46 36.67,99.22 32.7,103.19 32.7,103.98 31.91,104.78 15.72,104.78 14.92,103.98 14.92,96.2 v13.18,94.46 | v9.68,85.25 9.37,85.25 v6.83,82.71
GATE11  (via drill 0.35)
  Top 0.203: v36.67,92.87 35.24,92.87 IC4.2 | v7.14,85.25 6.51,85.25 v4.6,83.34
  Bottom 0.203: v36.67,92.87 33.97,92.87 31.59,95.25 29.21,95.25 27.78,93.82 26.19,93.82 23.81,96.2 17.3,96.2 9.84,88.74 9.84,87.95 v7.14,85.25 | v4.6,83.34 4.6,79.38 2.7,77.47 JP2.4
GATE12  (via drill 0.35)
  Top 0.203: v32.7,87 32.7,88.74 33.5,89.53 33.5,92.87 34.61,93.98 35.08,93.98 IC4.3 | v25.88,80.17 21.59,80.17 v20.64,79.22 | v9.05,72.07 5.4,72.07 2.7,74.77 JP2.5
  Bottom 0.203: v25.88,80.17 v32.7,87 | v20.64,79.22 20.32,79.22 19.37,78.26 14.92,78.26 13.97,77.31 13.97,76.99 v9.05,72.07
GATE13  (via drill 0.35)
  Top 0.203: v30.32,86.2 33.5,86.2 35.24,87.95 35.24,88.74 38.1,91.6 38.1,94.14 36.99,95.25 35.24,95.25 IC4.4 | v19.21,82.55 v22.07,85.41 | v16.99,80.33 16.99,77.15 v14.76,74.93 | v10,68.26 4.76,68.26 v4.6,68.1
  Bottom 0.203: v30.32,86.2 22.86,86.2 v22.07,85.41 | v16.99,80.33 v19.21,82.55 | v14.76,74.93 14.76,73.03 v10,68.26 | v4.6,68.1 4.6,70.33 2.7,72.23 JP2.6
GATE14  (via drill 0.35)
  Top 0.203: v31.27,90.01 32.86,91.6 32.86,94.77 34.61,96.52 35.08,96.52 IC4.5 | v16.03,92.55 16.03,90.17 17.46,88.74 17.46,87.15 17.78,86.84 17.78,85.25 13.65,81.12 v13.65,78.9 | v6.83,71.28 4.13,71.28 2.7,69.85 JP2.7
  Bottom 0.203: v31.27,90.01 23.02,90.01 20.48,92.55 v16.03,92.55 | v13.65,78.9 6.83,72.07 v6.83,71.28
GATE15  (via drill 0.35)
  Top 0.203: v35.08,85.25 38.73,88.9 38.73,94.77 35.72,97.79 35.24,97.79 IC4.6 | v8.41,70.33 5.71,70.33 2.7,67.31 JP2.8
  Bottom 0.203: v35.08,85.25 32.23,85.25 26.04,79.06 26.04,77.79 24.92,76.68 18.73,76.68 17.14,75.09 15.72,75.09 15.08,75.72 13.81,75.72 v8.41,70.33
GATE16  (via drill 0.35)
  Top 0.203: v38.1,99.85 37.47,99.22 35.24,99.22 IC4.7 | v9.05,66.2 8.1,65.25 6.03,65.25 4.92,66.36 4.29,66.36 2.7,64.77 JP2.9
  Bottom 0.203: v38.1,99.85 38.1,99.38 38.42,99.06 38.42,86.68 34.61,82.87 32.07,82.87 25.24,76.04 21.11,76.04 13.34,68.26 13.34,67.31 12.22,66.2 v9.05,66.2
GND  (via drill 0.35)
  Top 0.203: 9.37,82.39 9.37,80.96 10.48,79.85 10.48,79.53 11.11,78.9 | 9.37,82.39 9.37,83.82 C24.2 | 11.11,78.9 11.59,78.9 U23.12 11.11,78.9 | v19.53,79.53 20.64,80.64 20.64,80.96 C15.2 | 11.11,78.9 v10.32,78.11 | 14.92,93.66 14.92,87.95 10.32,83.34 | 14.92,93.66 14.92,98.58 17.78,101.44 22.7,101.44 23.5,100.65 C1.2 | 9.37,82.39 10.32,83.34 | v9.21,75.72 11.11,73.82 11.59,73.82 U23.8 | 10.32,83.34 7.62,86.04 6.51,86.04 5.56,85.09 2.7,85.09 JP2.1 | 24.13,92.23 24.13,93.66 C2.2 24.29,93.82 25.88,95.41 29.69,95.41 IC4.13 29.84,95.41 30.32,95.41 30.96,96.04 | 24.13,92.23 24.13,91.44 C3.2 | 30.96,96.04 30.96,96.68 34.61,100.33 35.08,100.33 IC4.8 | 24.13,92.23 20.32,92.23 | 20.32,92.23 18.57,92.23 IC1.5 | 33.81,84.93 33.81,85.72 36.35,88.27 TEENSY_3.2.GND | 33.81,84.93 33.81,84.45 C12.2 | 33.81,84.93 36.99,81.76 36.99,79.53 36.35,78.9 35.72,78.9 U33.12 35.56,78.74 v34.13,78.74 | U$4.4 U$4.3 U$4.5 U$4.6 U$4.8 U$4.7 32.86,50.96 32.86,54.61 29.84,57.63 29.37,57.63 C28.1 29.37,57.78 35.56,63.98 35.56,73.34 | 24.92,73.34 24.92,74.93 24.13,75.72 23.81,75.72 U1.12 | 24.92,73.34 24.92,71.44 24.29,70.8 23.81,70.8 U1.8 | 35.56,73.34 35.56,73.66 U33.8 | v26.19,73.34 24.92,73.34 | 35.56,73.34 v34.13,73.34 | 30.96,96.04 32.07,94.93 v32.07,91.92 | v16.03,93.66 14.92,93.66 | 20.32,92.23 v20.32,93.66 | 7.46,12.06 8.1,12.06 8.41,11.75 JP3.1 | 7.46,12.06 3.17,12.06 1.27,13.97 1.27,19.05 3.02,20.8 3.02,22.23 C29.2 3.17,22.38 v3.17,24.77 | 7.46,12.06 11.27,8.26 11.27,4.92 C5.- 11.43,4.92 17.46,4.92 C4.+ 17.62,4.92 18.26,4.92 19.84,6.51 33.5,6.51 | C9.2 27.78,28.73 30.32,28.73 33.34,25.72 C13.2 33.5,25.72 36.04,25.72 IC5.2 36.2,25.56 36.2,22.86 36.67,22.38 36.67,18.1
  Top 0.203: C21.2 38.26,3.02 35.24,3.02 33.5,4.76 C6.- 33.5,4.92 33.5,6.51 | 36.35,18.1 34.13,18.1 33.02,16.99 33.02,16.51 U28.12 32.86,16.35 32.86,14.92 30.48,12.54 | 36.35,18.1 36.67,18.1 | 36.67,18.1 38.26,18.1 C18.2 | 30.48,12.54 31.27,11.75 JP3.10 | 30.48,12.54 27.94,15.08 27.94,16.35 U28.8 | 33.5,6.51 33.5,11.11 36.35,13.97 36.35,18.1 | 10.79,57.15 8.26,57.15 6.99,55.88 DAC2.5 5.24,56.99 4.76,56.99 | 10.79,57.15 11.75,57.15 | 11.75,57.15 13.97,57.15 C27.2 | 4.76,56.99 2.7,56.99 JP2.12 | DAC1.5 6.35,62.71 4.76,61.12 4.76,56.99 | 20.48,34.77 21.27,35.56 IC2.2 | 20.48,34.77 20,34.29 18.41,34.29 15.88,36.83 15.08,36.83 C10.2 | 20.48,34.77 20.64,34.77 v21.43,33.97 23.18,32.23 C8.2 | v21.43,39.85 21.43,41.75 IC2.4 | DAC4.5 7.62,39.37 9.37,39.37 9.68,39.69 13.18,39.69 C7.2 13.34,39.85 v15.4,41.91 | v20.16,21.91 21.43,23.18 C30.1 | 10.79,57.15 10.79,50.96 9.37,49.53 7.62,49.53 DAC3.5 | v21.91,67.79 17.14,67.79 16.35,68.58 12.38,68.58 11.75,67.94 11.75,57.15
  Bottom 0.203: v19.53,79.53 14.13,79.53 13.97,79.69 11.91,79.69 v10.32,78.11 9.21,76.99 v9.21,75.72 | v34.13,78.74 v34.13,73.34 v26.19,73.34 26.19,72.55 21.91,68.26 v21.91,67.79 | v32.07,91.92 32.38,91.92 35.88,88.42 36.35,88.42 TEENSY_3.2.GND | v20.32,93.66 v16.03,93.66 | v21.43,33.97 v21.43,39.85 20,39.85 17.94,41.91 v15.4,41.91 | v20.16,21.91 20.16,22.38 10.16,32.38 5.87,32.38 3.17,35.08 | 3.17,35.08 2.54,35.72 2.54,37.47 5.08,40.01 | 5.08,40.01 5.71,40.64 DAC4.5 | DAC3.5 6.35,47.47 5.08,46.2 5.08,40.01 | 3.17,35.08 v3.17,24.77
  pour Top: 1,105 39,105 39,1 1,1
  pour Bottom: 1,105 39,105 39,1 1,1
MIDI_IN_L  (via drill 0.35)
  Top 0.203: D1.A 5.56,92.55 v7.3,92.55 9.05,92.55 9.37,92.23 IC1.4
  Bottom 0.203: v7.3,92.55 7.3,87.95 6.03,86.68 6.03,65.88 5.08,64.93 5.08,62.07 2.7,59.69 JP2.11
MIDI_IN_R  (via drill 0.35)
  Top 0.203: v2.7,93.82 2.7,97.79 R1.1 | v4.6,65.56 4.6,64.14 2.7,62.23 JP2.10
  Bottom 0.203: v2.7,93.82 2.7,90.81 4.76,88.74 4.76,86.2 5.4,85.57 5.4,66.36 v4.6,65.56
N$2
  Top 0.203: 7.78,97.79 8.89,97.79 9.37,97.31 IC1.2 | 7.78,97.79 4.45,97.79 R1.2 | 7.78,97.79 2.7,92.71 1.91,92.71 D1.C
N$4  (via drill 0.35)
  Top 0.203: 19.84,96.04 18.57,94.77 IC1.6 | 19.84,96.04 20.8,97 22.07,97 R2.1 | 19.84,96.04 v22.7,93.19
  Bottom 0.203: v22.7,93.19 29.21,93.19 32.07,90.33 32.07,90.17 33.81,88.42 TEENSY_3.2.0
N$6  (via drill 0.35)
  Top 0.203: v33.66,36.35 32.38,36.35 D3.A | U$4.9 U$4.10
  Bottom 0.203: v33.66,36.35 33.66,39.21 32.86,40.01 32.86,50.64 U$4.9
N$8
  Top 0.203: D5.C 30,43.66 32.54,43.66 U$4.1 U$4.2
N$10  (via drill 0.35)
  Top 0.203: v31.11,41.75 34.13,38.73 35.4,38.73 FB1.1 | v29.84,36.2 28.57,36.2 D3.C
  Bottom 0.203: v31.11,41.75 31.11,40.16 29.84,38.89 v29.84,36.2
N$11  (via drill 0.35)
  Top 0.203: v10.95,67.31 R39.2 | v12.54,67.63 13.97,67.63 C16.1 14.13,67.47 14.13,62.55 R40.1 14.13,62.39 16.83,59.69 16.83,56.2 17.94,55.09 18.73,55.09 U19.2
  Bottom 0.203: v10.95,67.31 12.22,67.31 v12.54,67.63
N$13
  Top 0.203: FB3.1 27.62,40.16 27.62,42.23 26.19,43.66 D5.A
N$14
  Top 0.203: 24.92,34.45 24.92,32.23 C8.1 | 24.92,34.45 23.81,35.56 IC2.3 | 24.92,34.45 25.4,34.45 26.04,35.08 29.05,35.08 32.86,31.27 32.86,30.96 33.34,30.48 JP1.3-5V_VR
N$52  (via drill 0.35)
  Top 0.203: R42.2 14.92,43.5 14.92,46.2 14.13,46.99 C17.1 14.13,47.15 v14.13,49.85 14.13,52.07 R43.1 | v16.51,49.85 18.73,49.85 U19.6
  Bottom 0.203: v14.13,49.85 v16.51,49.85
N$55  (via drill 0.35)
  Top 0.203: R46.1 27.62,47.47 27.62,52.55 C19.1 27.46,52.7 v27.46,53.82 | 23.34,49.85 22.38,48.9 22.38,46.2 R45.2 | 23.34,49.85 23.97,49.85 U19.9 23.34,49.85 | 23.34,49.85 v22.23,50.96
  Bottom 0.203: v27.46,53.82 27.46,54.93 26.19,56.2 25.56,56.2 23.02,53.66 23.02,51.75 v22.23,50.96
N$58  (via drill 0.35)
  Top 0.203: v25.08,64.77 22.38,64.77 R49.1 | v26.99,66.67 26.99,67.47 27.46,67.94 R48.2 27.62,68.1 28.57,69.06 31.75,69.06 32.38,68.42 32.38,66.67 29.37,63.66 29.37,62.87 C20.1 29.21,62.71 26.51,60.01 26.51,56.99 26.67,56.83 26.67,55.09 26.19,54.61 25.56,54.61 25.24,54.93 24.13,54.93 U19.13
  Bottom 0.203: v26.99,66.67 v25.08,64.77
N$61  (via drill 0.35)
  Top 0.203: v4.76,20.32 4.76,18.57 R51.2 | 4.29,24.77 3.17,25.88 C22.1 3.17,26.04 3.17,28.57 R52.1 | 4.29,24.77 v4.76,24.29 | 4.29,24.77 9.21,24.77 U21.2
  Bottom 0.203: v4.76,24.29 v4.76,20.32
N$64  (via drill 0.35)
  Top 0.203: v5.87,11.27 4.92,10.32 R54.2 | C23.1 4.92,14.61 v5.87,15.56 7.46,15.56 | 7.46,15.56 8.41,15.56 R55.1 | v7.46,19.68 9.21,19.68 U21.6 | 7.46,15.56 v7.46,17.46
  Bottom 0.203: v5.87,15.56 v5.87,11.27 | v7.46,17.46 v7.46,19.68
N$67
  Top 0.203: 20.32,15.72 20.64,15.72 R58.1 20.32,15.72 | 20.32,15.72 16.19,15.72 R57.2 | 20.32,15.72 20.32,19.84 | 20.32,19.84 20.32,20.16 C25.1 20.32,19.84 | 20.32,19.84 14.61,19.84 U21.9
N$70  (via drill 0.35)
  Top 0.203: U21.13 14.61,24.92 19.05,24.92 21.43,27.3 R61.1 21.43,27.46 18.26,30.64 14.92,30.64 C26.1 14.76,30.64 13.49,31.91 v12.54,31.91 | v6.19,33.18 5.08,34.29 3.49,34.29 R60.2
  Bottom 0.203: v6.19,33.18 11.27,33.18 v12.54,31.91
N$1000  (via drill 3.2)
  other vias: 25,25
N$1001  (via drill 3.2)
  other vias: 25,83
OFFSET1  (via drill 0.35)
  Top 0.203: v13.34,45.88 13.34,43.5 R42.1 | v7.78,66.04 6.51,67.31 R39.1
  Bottom 0.203: v13.34,45.88 13.34,53.66 10.79,56.2 10.79,58.26 9.37,59.69 7.62,59.69 6.67,60.64 | v7.78,66.04 8.1,66.04 10.16,63.98 10.16,63.02 9.37,62.23 8.26,62.23 6.67,60.64 | 6.67,60.64 DAC1.3
OFFSET2  (via drill 0.35)
  Top 0.203: v22.23,53.66 20.64,52.07 20.64,46.2 R45.1 20.48,46.04 20.48,44.77 19.37,43.66 19.37,41.75 v17.62,40.01 | v28.73,64.14 28.73,65.09 28.42,65.41 28.42,67.15 29.21,67.94 R48.1 | DAC2.3 7.14,53.34 8.41,54.61 9.37,54.61 10.16,53.82 10.16,52.86 9.37,52.07 8.41,52.07 7.62,51.28 7.62,50.32 6.83,49.53 5.87,49.53 3.17,46.83 3.17,37.31 v3.33,37.15 | v4.29,35.88 5.87,34.29 7.14,34.29 v7.62,34.77
  Bottom 0.203: v22.23,53.66 22.23,54.13 28.73,60.64 v28.73,64.14 | v3.33,37.15 3.33,36.83 v4.29,35.88 | v7.62,34.77 7.62,36.04 8.41,36.83 11.75,36.83 14.92,40.01 v17.62,40.01
OFFSET3  (via drill 0.35)
  Top 0.203: v2.38,11.75 3.02,11.11 3.02,10.32 R54.1 | v2.7,17.14 2.7,18.1 3.02,18.41 R51.1
  Bottom 0.203: v2.38,11.75 2.38,16.83 v2.7,17.14 1.27,18.57 1.27,44.93 5.87,49.53 6.83,49.53 7.62,48.74 7.62,47.78 6.35,46.51 DAC3.3
OFFSET4  (via drill 0.35)
  Top 0.203: DAC4.3 5.4,38.1 1.75,34.45 R60.1 1.75,34.29 v4.29,31.75 | v14.45,17.3 14.45,15.72 R57.1
  Bottom 0.203: v14.45,17.3 4.29,27.46 v4.29,31.75
SCK  (via drill 0.35)
  Top 0.203: IC4.11 29.69,97.95 27.94,97.95 23.5,102.39 4.6,102.39 3.49,103.5 TEENSY_3.2.13 | 14.92,72.23 10,72.23 9.37,72.87 5.4,72.87 5.08,73.18 5.08,76.68 5.87,77.47 6.19,77.47 U23.4 6.35,77.63 6.67,77.95 v7.78,77.95 | v15.72,73.03 14.92,72.23 | v16.83,74.14 17.94,74.14 18.26,74.45 U1.4 | v28.42,70.01 31.59,73.18 31.59,76.68 30.8,77.47 30.32,77.47 U33.4 | v25.4,68.26 22.54,68.26 20.95,69.85 17.3,69.85 14.92,72.23 | v24.92,30.48 24.92,28.1 25.24,27.78 27.15,27.78 31.59,23.34 31.59,21.91 U28.4 | v30.32,46.35 30.32,56.04 v29.84,56.52 | v12.06,89.53 v12.06,94.93
  Bottom 0.203: v16.83,74.14 v15.72,73.03 | v25.4,68.26 27.15,70.01 v28.42,70.01 28.42,69.22 30.64,66.99 30.64,60.96 29.84,60.17 v29.84,56.52 | v24.92,30.48 25.24,30.48 29.05,34.29 29.05,45.09 v30.32,46.35 | v12.06,94.93 3.49,103.5 TEENSY_3.2.13 | v12.06,89.53 12.06,89.06 12.38,88.74 12.38,83.98 7.62,79.22 7.62,78.11 v7.78,77.95
SDI  (via drill 0.35)
  Top 0.203: 7.46,76.2 6.35,76.2 U23.5 | 7.46,76.2 10.79,72.87 14.45,72.87 15.4,73.82 16.03,73.82 16.51,73.34 18.26,73.34 U1.5 18.41,73.18 18.73,73.18 22.86,69.06 v24.61,69.06 | 28.73,75.09 28.42,74.77 v28.42,72.55 | 28.73,75.09 29.84,76.2 30.16,76.2 U33.5 | v30.48,23.34 30.48,21.91 U28.5 | v33.66,34.29 v33.66,31.27 | v32.86,38.89 30,41.75 v30,42.39 | v31.27,94.46 30.96,94.14 29.84,94.14 IC4.14 | 28.73,75.09 v28.73,80.64 | v9.68,86.36 8.89,86.36 6.99,88.27 6.03,88.27 TEENSY_3.2.11 | 7.46,76.2 v7.78,76.52
  Bottom 0.203: 27.78,71.91 24.92,69.06 v24.61,69.06 | 27.78,71.91 v28.42,72.55 | v30.48,23.34 30.48,28.1 v33.66,31.27 | v33.66,34.29 33.66,35.24 32.86,36.04 v32.86,38.89 | v30,42.39 30,44.93 31.43,46.35 31.43,67.15 29.21,69.37 29.21,70.48 27.78,71.91 | v31.27,94.46 30.48,93.66 30.48,93.03 30.96,92.55 31.59,92.55 31.75,92.71 32.38,92.71 35.56,89.53 36.99,89.53 37.78,88.74 37.78,86.84 34.45,83.5 31.59,83.5 v28.73,80.64 | v9.68,86.36 10.48,85.57 10.48,82.87 6.99,79.38 6.99,77.31 v7.78,76.52
VREF1  (via drill 0.35)
  Top 0.203: 22.54,75.25 23.18,74.61 23.65,74.61 U1.11 | 22.54,75.25 22.54,76.36 23.18,76.99 23.65,76.99 U1.13 | v21.91,75.25 22.54,75.25 | DAC1.4 DAC1.1
  Bottom 0.203: v21.91,75.25 21.11,75.25 13.97,68.1 13.97,66.04 DAC1.4
VREF2  (via drill 0.35)
  Top 0.203: 12.54,77.95 12.86,78.26 12.86,79.38 12.22,80.01 11.75,80.01 U23.13 | 12.54,77.95 12.22,77.63 11.75,77.63 U23.11 | v13.18,77.31 12.54,77.95 | v7.62,64.29 7.62,60.48 6.83,59.69 v5.56,59.69 | DAC2.1 DAC2.4
  Bottom 0.203: v13.18,77.31 7.62,71.75 7.62,66.99 6.99,66.36 6.99,64.93 v7.62,64.29 | v5.56,59.69 5.56,59.37 5.08,58.9 5.08,52.86 6.35,51.59 DAC2.1
VREF3  (via drill 0.35)
  Top 0.203: v31.75,14.92 31.75,16.35 U28.11 | v33.66,14.92 33.66,15.4 34.13,15.88 34.13,16.35 U28.13 | DAC3.1 DAC3.4
  Bottom 0.203: v33.66,14.92 v31.75,14.92 30.64,14.92 11.59,33.97 6.19,33.97 5.08,35.08 5.08,38.58 5.87,39.37 6.83,39.37 7.62,40.16 7.62,41.91 DAC3.1
VREF4  (via drill 0.35)
  Top 0.203: U33.13 35.56,80.01 34.29,80.01 33.34,79.06 33.34,78.42 34.13,77.63 35.56,77.63 U33.11 35.72,77.47 v37.15,77.47 | v29.21,65.72 v31.59,68.1
  Bottom 0.203: v37.15,77.47 37.15,73.66 v31.59,68.1 | v29.21,65.72 26.67,63.18 26.67,60.8 19.68,53.82 19.68,44.93 18.26,43.5 13.81,43.5 8.89,38.58 DAC4.4 DAC4.1